# EAGLE board v2smd (EAGLE 7.2.0)
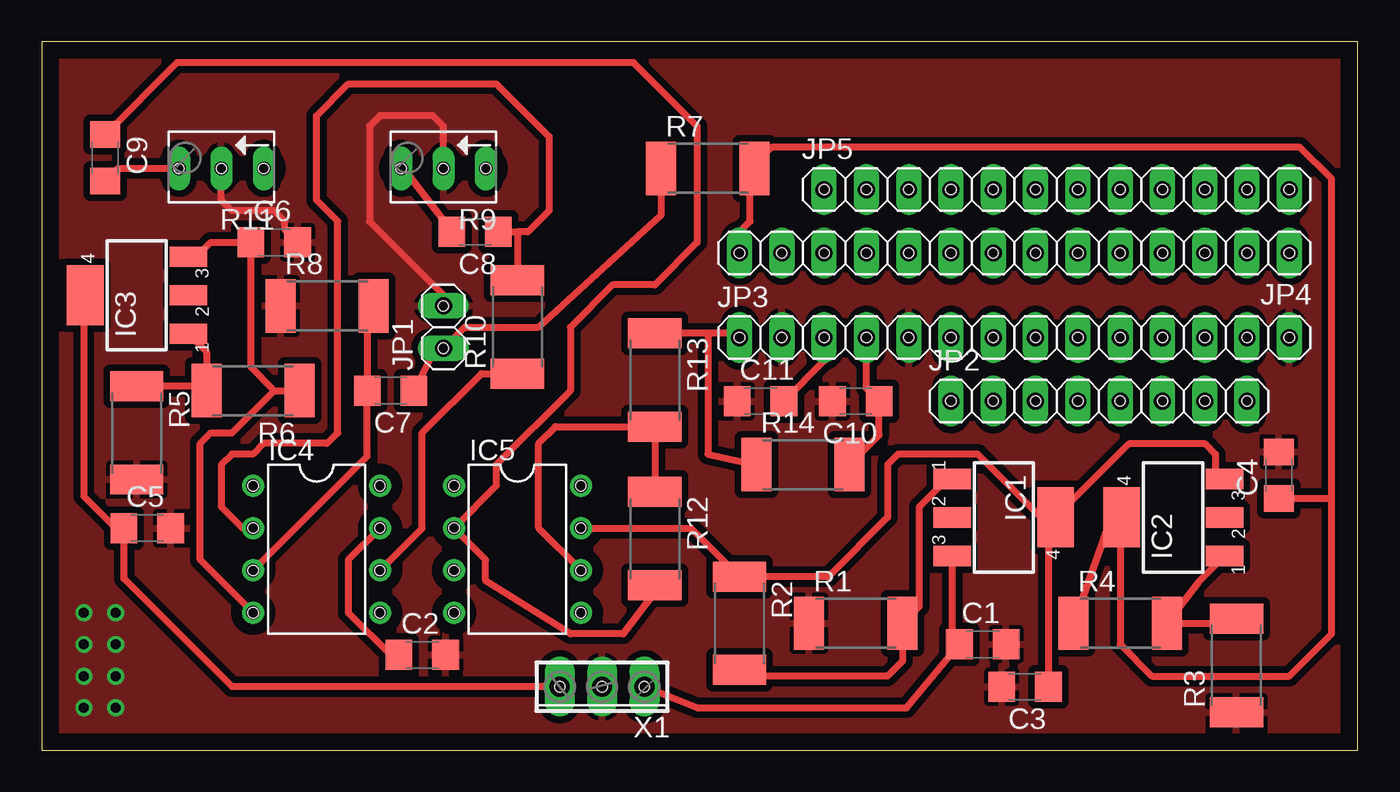
[diagram p0: board, top side]
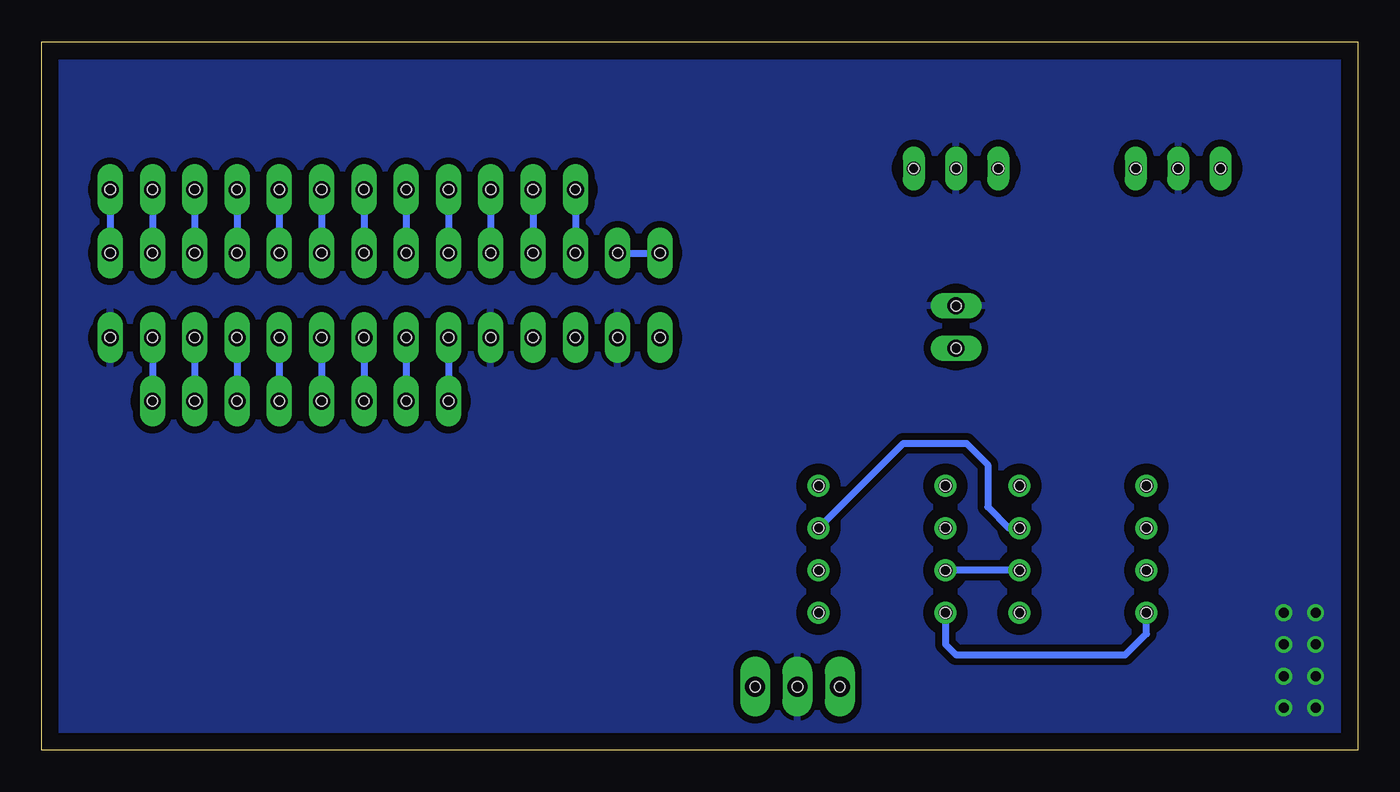
[diagram p1: board, bottom side, seen from below]

Size 79.05 x 42.53 mm. Coordinates in mm from the lower left corner, seen from the top.
Outline: 0,0 79.05,0 79.05,42.53 0,42.53 0,0
Copper layers (1*16): Top 0.035mm / dielectric 1.5mm / Bottom 0.035mm
Design rules "default": minimum track width 10mil, minimum drill 24mil, track to track 8mil, track to pad 8mil, pad to pad 8mil, via to via 8mil, smd to smd 8mil, copper to edge 40mil, drill to drill 8mil, minimum pad ring 10mil, minimum via ring 8mil, stop-mask expansion 4mil, vias tented up to drill 0mil, thermal gap 10mil
Net classes: 0 default: clearance 0.205 mm
Holes 0.6 mm at 10.79,34.92 8.26,34.92 21.59,34.92 24.13,34.92 26.67,34.92 24.13,26.67 24.13,24.13 46.99,33.66 49.53,33.66 52.07,33.66 54.61,33.66 57.15,33.66 59.69,33.66 62.23,33.66 64.77,33.66 67.31,33.66 69.85,33.66 72.39,33.66 74.93,33.66 41.91,29.84 44.45,29.84 46.99,29.84 49.53,29.84 52.07,29.84 54.61,29.84 57.15,29.84 59.69,29.84 62.23,29.84 64.77,29.84 67.31,29.84 69.85,29.84 72.39,29.84 74.93,29.84 74.93,24.77 72.39,24.77 69.85,24.77 67.31,24.77 64.77,24.77 62.23,24.77 59.69,24.77 57.15,24.77 54.61,24.77 52.07,24.77 49.53,24.77 46.99,24.77 44.45,24.77 41.91,24.77 54.61,20.95 57.15,20.95 59.69,20.95 62.23,20.95 64.77,20.95 67.31,20.95 69.85,20.95 72.39,20.95 36.2,3.81 33.66,3.81 31.11,3.81 32.38,15.88 32.38,13.34 32.38,10.79 32.38,8.26 24.77,8.26 24.77,10.79 24.77,13.34 24.77,15.88 20.32,15.88 20.32,13.34 20.32,10.79 20.32,8.26 12.7,8.26 12.7,10.79 12.7,13.34 12.7,15.88 13.34,34.92

## Footprints (pad centres in the part's own frame; a part is rotated, then mirrored left to right if it is on the bottom)
C1206 = smd 1.6 x 1.8: 1 -1.4,0; 2 1.4,0
SOT223 = smd 1.219 x 2.235: 1 -2.311,-3.099; 2 0,-3.099; 3 2.311,-3.099 | smd 3.6 x 2.2: 4 0,3.099
DIL08 = drill 0.813 pad 1.27: 1 -3.81,-3.81; 2 -1.27,-3.81; 3 1.27,-3.81; 4 3.81,-3.81; 5 3.81,3.81; 6 1.27,3.81; 7 -1.27,3.81; 8 -3.81,3.81
1X02 = drill 1.016 long: 1 -1.27,0; 2 1.27,0
1X08 = drill 1.016 long: 1 -8.89,0; 2 -6.35,0; 3 -3.81,0; 4 -1.27,0; 5 1.27,0; 6 3.81,0; 7 6.35,0; 8 8.89,0
1X14 = drill 1.016 long: 1 -16.51,0; 2 -13.97,0; 3 -11.43,0; 4 -8.89,0; 5 -6.35,0; 6 -3.81,0; 7 -1.27,0; 8 1.27,0; 9 3.81,0; 10 6.35,0; 11 8.89,0; 12 11.43,0; 13 13.97,0; 14 16.51,0
1X12 = drill 1.016 long: 1 -13.97,0; 2 -11.43,0; 3 -8.89,0; 4 -6.35,0; 5 -3.81,0; 6 -1.27,0; 7 1.27,0; 8 3.81,0; 9 6.35,0; 10 8.89,0; 11 11.43,0; 12 13.97,0
R2512 = smd 1.8 x 3.2: 1 -2.8,0; 2 2.8,0
B64Y = drill 0.813 long: A 2.54,0; E -2.54,0; S 0,0
3POL254 = drill 1.2 long: 1 -2.54,0; 2 0,0; 3 2.54,0

## Placement (x,y rotation side)
C1  0.1u  [C1206]  56.52,6.35 0 top
C2  1u  [C1206]  22.86,5.71 0 top
C3  0.1u  [C1206]  59.05,3.81 180 top
C4  1u  [C1206]  74.3,16.51 90 top
C5  1u  [C1206]  6.35,13.34 0 top
C6  1u  [C1206]  13.97,30.48 0 top
C7  1u  [C1206]  20.95,21.59 180 top
C8  10u  [C1206]  26.04,31.11 180 top
C9  10u  [C1206]  3.81,35.56 270 top
C10  2.2u  [C1206]  48.9,20.95 180 top
C11  2.2u  [C1206]  43.18,20.95 0 top
IC1  317EMP  [SOT223]  57.78,13.97 270 top
IC2  317EMP  [SOT223]  67.94,13.97 90 top
IC3  337IMP  [SOT223]  5.71,27.3 90 top
IC4  LM741P  [DIL08]  16.51,12.06 270 top
IC5  LM741P  [DIL08]  28.57,12.06 270 top
JP1  [1X02]  24.13,25.4 90 top
JP2  [1X08]  63.5,20.95 0 top
JP3  [1X14]  58.42,24.77 0 top
JP4  [1X14]  58.42,29.84 180 top
JP5  [1X12]  60.96,33.66 0 top
R1  1.69k  [R2512]  48.9,7.62 0 top
R2  240  [R2512]  41.91,7.62 270 top
R3  1.69k  [R2512]  71.75,5.08 90 top
R4  240  [R2512]  64.77,7.62 0 top
R5  825  [R2512]  5.71,19.05 270 top
R6  120  [R2512]  12.7,21.59 180 top
R7  2200  [R2512]  40.01,34.92 0 top
R8  47k  [R2512]  17.14,26.67 0 top
R9  5k  [B64Y]  24.13,34.92 180 top
R10  33k  [R2512]  28.57,25.4 90 top
R11  5k  [B64Y]  10.79,34.92 180 top
R12  33k  [R2512]  36.83,12.7 270 top
R13  220  [R2512]  36.83,22.23 270 top
R14  33k  [R2512]  45.72,17.14 0 top
X1  [3POL254]  33.66,3.81 180 top

## Library data of the parts
C1-C11 R1-R8 R10 R12-R14 = rcl
IC1-IC5 = linear
JP1-JP5 = pinhead
R9 R11 = pot
X1 = con-phoenix-254; OC_FARNELL: unknown; OC_NEWARK: unknown

## Nets
+5V: C4.1 IC2.4 JP4.13 JP4.14 R4.1 R7.2
+10V: C2.1 C3.1 IC1.4 IC2.3 IC4.7 IC5.7 R2.1
-10V: C6.1 IC3.3 IC4.4 IC5.4 R6.1
AGND: C1.2 C2.2 C3.2 C4.2 C5.2 C6.2 C10.2 C11.1 JP1.2 JP3.2 JP3.5 JP3.14 R1.1 R3.1 R5.2 R8.1 R9.S R11.S X1.2
N$1: IC4.6 IC5.3 R10.1
N$2: C7.1 JP1.1 R7.1
N$3: C7.2 IC4.3 R8.2
N$4: C8.1 IC4.2 R10.2
N$5: IC5.6 R12.1 R13.2
N$6: C9.1 IC5.2 R12.2
N$7: JP3.1 R13.1 R14.1
N$8: IC1.1 R1.2 R2.2
N$9: IC2.1 R3.2 R4.2
N$10: IC3.1 R5.1 R6.2
N$11: C8.2 R9.A
N$14: C9.2 R11.A
N$15: C11.2 JP3.3
N$16: C10.1 JP3.4 R14.2
N$18: JP2.8 JP3.13
N$19: JP2.7 JP3.12
N$20: JP2.6 JP3.11
N$21: JP2.5 JP3.10
N$22: JP2.4 JP3.9
N$23: JP2.3 JP3.8
N$24: JP2.2 JP3.7
N$25: JP2.1 JP3.6
N$26: JP4.1 JP5.12
N$27: JP4.2 JP5.11
N$28: JP4.3 JP5.10
N$29: JP4.4 JP5.9
N$30: JP4.5 JP5.8
N$31: JP4.6 JP5.7
N$32: JP4.7 JP5.6
N$33: JP4.8 JP5.5
N$34: JP4.9 JP5.4
N$35: JP4.10 JP5.3
N$36: JP4.11 JP5.2
N$37: JP4.12 JP5.1
V+: C1.1 IC1.3 X1.1
V-: C5.1 IC3.4 X1.3

## Tracks (layer width: path | path; a pad name or v marks a point on that pad's centre or on a via)
+5V
  Top 0.406: R4.1 63.88,13 IC2.4 64.77,13.89 64.77,6.35 66.67,4.45 74.93,4.45 77.47,6.99 77.47,15.24 | 77.47,15.24 77.47,34.29 75.56,36.2 43.81,36.2 43.18,35.56 43.18,35.3 R7.2 42.55,34.66 42.55,31.75 41.91,31.11 JP4.14 | C4.1 77.34,15.11 77.47,15.24
  Bottom 0.406: JP4.13 JP4.14
+10V
  Top 0.406: IC5.7 38.99,13.34 R2.1 47.25,10.42 50.8,13.97 50.8,17.14 51.44,17.78 56.22,17.78 60.45,13.54 | IC4.7 18.41,11.43 18.41,8.26 20.95,5.71 C2.1 | 60.45,13.54 IC1.4 65.33,18.41 69.85,18.41 70.48,17.78 70.48,16.51 70.71,16.28 IC2.3 | 60.45,13.54 C3.1
  Bottom 0.406: IC5.7 27.3,18.41 23.5,18.41 22.23,17.14 22.23,14.61 20.95,13.34 IC4.7
-10V
  Top 0.406: 9.22,29.21 IC3.3 9.3,29.62 10.16,30.48 C6.1 12.57,22.99 13.97,21.59 | IC4.4 9.53,11.43 9.53,18.41 10.16,19.05 11.43,19.05 13.97,21.59 | 13.97,21.59 R6.1
  Bottom 0.406: IC5.4 24.77,6.35 24.13,5.71 13.97,5.71 12.7,6.99 IC4.4
AGND  (via drill 0.6)
  Top 0.406: C6.2 14.61,31.25 14.61,31.75 13.97,32.38 11.43,32.38 10.79,33.02 R11.S | R9.S 24.13,37.47 23.5,38.1 20.32,38.1 19.68,37.47 19.68,31.75 24.13,27.3 JP1.2
  other vias: 2.54,8.26 4.45,4.45 4.45,2.54 2.54,2.54 2.54,4.45 2.54,6.35 4.45,6.35 4.45,8.26
  pour Top (isolate 0.406): 0,0 0,42.55 78.74,42.55 78.74,0
  pour Bottom (isolate 0.406): 0,0 0,41.27 78.74,41.27 78.74,0
N$1
  Top 0.406: IC4.6 22.86,13.34 22.86,19.05 26.41,22.6 R10.1
  Bottom 0.406: IC4.6 IC5.3
N$2
  Top 0.406: C7.1 23.62,24.13 JP1.1 25.4,25.4 29.84,25.4 37.2,32.12 R7.1
N$3
  Top 0.406: R8.2 19.55,26.28 C7.2 19.55,17.65 IC4.3
N$4
  Top 0.406: C8.1 27.94,31.11 28.57,31.11 | IC4.2 12.06,13.34 10.79,14.61 10.79,17.14 11.43,17.78 12.7,17.78 13.34,18.41 17.14,18.41 17.78,19.05 17.78,31.75 16.51,33.02 16.51,38.1 18.41,40.01 27.3,40.01 30.48,36.83 30.48,32.38 29.21,31.11 28.57,31.11 | 28.57,31.11 R10.2
N$5
  Top 0.406: R12.1 R13.2 30.86,19.43 29.84,18.41 29.84,13.34 IC5.6
N$6
  Top 0.406: R12.2 36.83,9.53 34.92,6.99 31.75,6.99 26.67,10.16 26.67,11.43 IC5.2 27.3,15.88 27.3,17.14 31.75,21.59 31.75,25.4 34.29,27.94 36.83,27.94 39.37,30.48 39.37,37.47 35.56,41.27 8.12,41.27 C9.1
N$7
  Top 0.406: 40.01,25.02 40.01,17.78 41.65,17.41 R14.1 | JP3.1 41.65,25.02 40.01,25.02 | 40.01,25.02 R13.1
N$8
  Top 0.406: R2.2 42.28,4.45 50.8,4.45 51.7,5.34 R1.2 52.7,8.63 52.7,14.61 54.38,16.28 IC1.1
N$9
  Top 0.406: R3.2 70.22,7.62 R4.2 69.47,10.09 IC2.1
N$10
  Top 0.406: IC3.1 9.9,23.91 R6.2 9.64,21.85 R5.1
N$11
  Top 0.406: R9.A 22.09,34.42 C8.2
N$14
  Top 0.406: C9.2 4.58,34.92 R11.A
N$15
  Top 0.406: C11.2 46.99,23.36 JP3.3
N$16
  Top 0.406: JP3.4 49.53,21.72 C10.1 50.3,18.92 R14.2
N$18
  Bottom 0.406: JP3.13 JP2.8
N$19
  Bottom 0.406: JP3.12 JP2.7
N$20
  Bottom 0.406: JP3.11 JP2.6
N$21
  Bottom 0.406: JP3.10 JP2.5
N$22
  Bottom 0.406: JP3.9 JP2.4
N$23
  Bottom 0.406: JP3.8 JP2.3
N$24
  Bottom 0.406: JP3.7 JP2.2
N$25
  Bottom 0.406: JP3.6 JP2.1
N$26
  Bottom 0.406: JP5.12 JP4.1
N$27
  Bottom 0.406: JP5.11 JP4.2
N$28
  Bottom 0.406: JP5.10 JP4.3
N$29
  Bottom 0.406: JP5.9 JP4.4
N$30
  Bottom 0.406: JP5.8 JP4.5
N$31
  Bottom 0.406: JP5.7 JP4.6
N$32
  Bottom 0.406: JP5.6 JP4.7
N$33
  Bottom 0.406: JP5.5 JP4.8
N$34
  Bottom 0.406: JP5.4 JP4.9
N$35
  Bottom 0.406: JP5.3 JP4.10
N$36
  Bottom 0.406: JP5.2 JP4.11
N$37
  Bottom 0.406: JP5.1 JP4.12
V+
  Top 0.406: X1.1 39.37,2.54 51.94,2.54 C1.1 54.69,6.78 IC1.3
V-
  Top 0.406: IC3.4 2.54,27.23 2.54,15.24 4.45,13.34 C5.1 4.95,10.29 11.43,3.81 X1.3